# Altium PCB MainBoard.PCBDOC
Units mm, origin at the board's own origin, x right, y up, seen from the top; angles counter-clockwise.
Board outline 70.02 x 98.52 mm, 2 copper layers (Top Layer, Bottom Layer); 72 components, 92 nets, 308 pads, 55 vias.
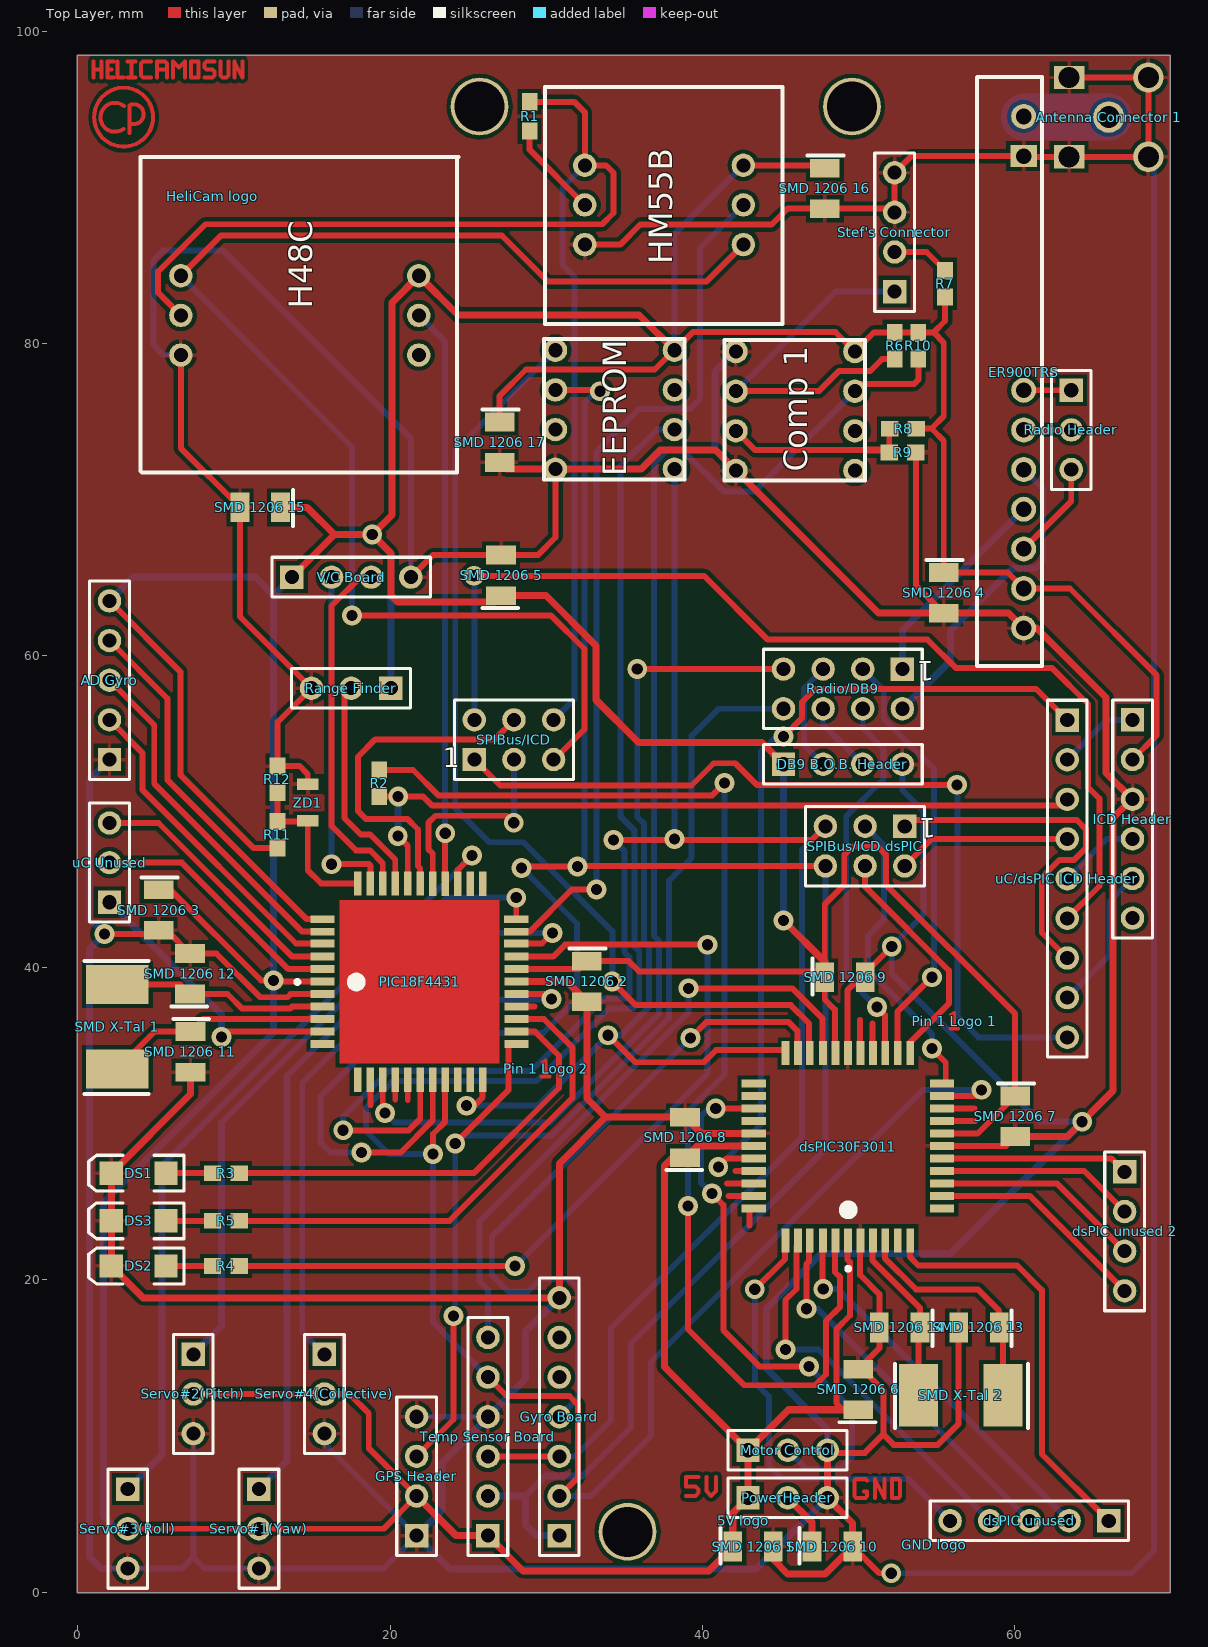
[diagram p0: Top Layer view]
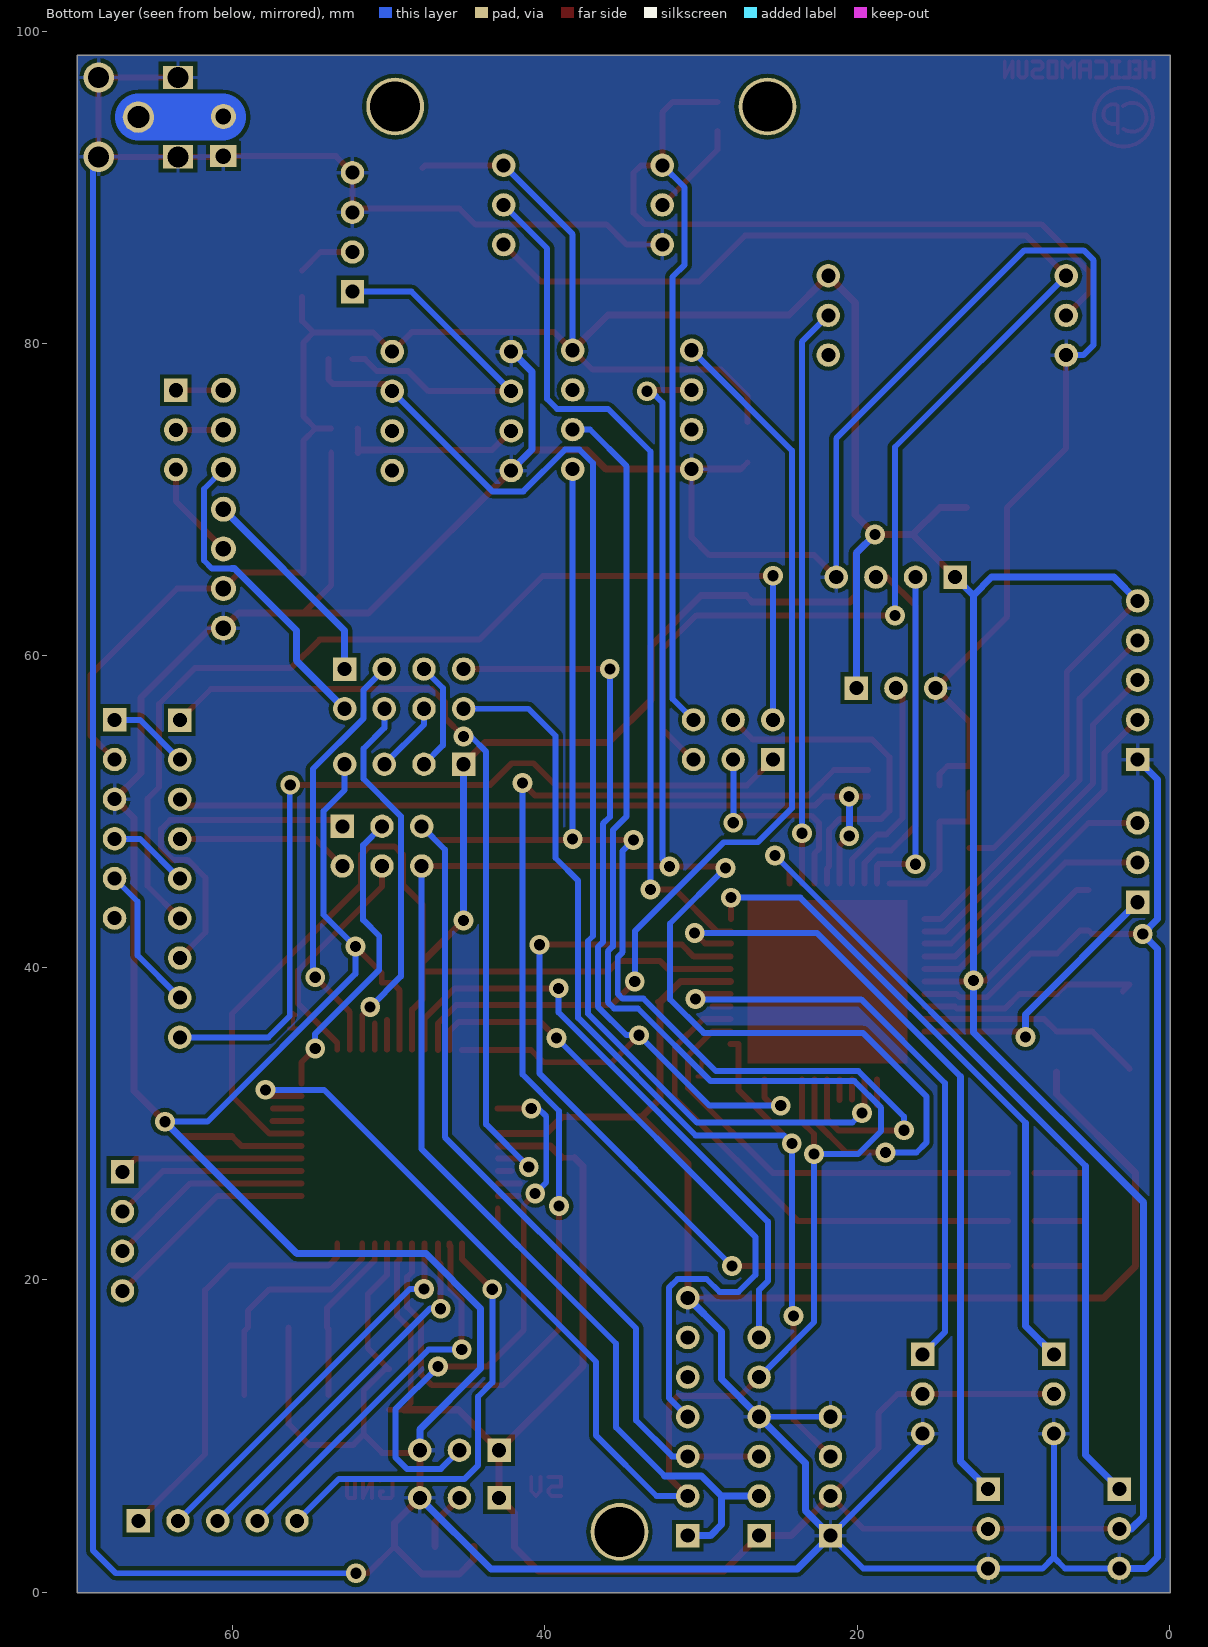
[diagram p1: Bottom Layer view, seen from below]

## Layer stack, top to bottom
Top Layer: signal copper 0.0356
Dielectric: core 0.32, FR-4, Dk 4.8
Bottom Layer: signal copper 0.0356

## Board outline
-0.05,-0.05 69.97,-0.05 69.97,98.47 -0.05,98.47

## Design rules (kind name [scope] priority, off if disabled: settings)
Clearance Clearance_1 [All] p1: gap=0.254
ComponentClearance [All] p1: gap=0.254 collisioncheckmode=0
HoleSize [All] p1: absolutevalues=TRUE maxlimit=5 minlimit=0.203 maxpercent=80.000 minpercent=20.000
PolygonConnect [All] p1: connectstyle=Relief reliefconductorwidth=0.254 reliefentries=4 polygonreliefangle="90 Angle"
RoutingVias [All] p1: holewidth=0.711 width=1.27 viastyle="Through Hole" minholewidth=0.711 minwidth=1.27 maxholewidth=0.711 maxwidth=1.27
SolderMaskExpansion [All] p1: expansion=0.102
TestPointUsage [All] p1: valid=0 allowmultiple=FALSE
Testpoint [All] p1: side=15 testpointundercomponent=TRUE minsize=1.016 maxsize=2.54 preferedsize=1.524 minholesize=0 maxholesize=1.016 preferedholesize=0.813 testpointgrid=0.025 style=1023 order=0-112345678
Width [All] p1: maxlimit=4 minlimit=0.203 preferedwidth=0.381
16 further rules are at their usual default settings.

## Components (designator, comment, footprint, x,y, rotation, side; value= is the part's Value field where it differs from the comment)
"5V logo" "logo" "5V logo" 42.672,4.572 r0 top
"AD Gyro" "Header 5" HDR1X5 2.032,53.34 r90 top
"Antenna Connector 1" "Antenna Connector" "Antenna Connector" 68.58,97.028 r270 top
"Carl logo" "logo" "Carl Logo" -4.064,101.6 r0 top
"Comp 1" "Comparator" "8-Pin DIP" 40.64,72.502 r0 top
"DB9 B.O.B. Header" "DB9 Break Out Board Header" HDR1X4 45.204,53.038 r0 top
DS1 "LED2" DSO-F2/D6.1 3.902,26.84 r180 top
DS2 "LED2" DSO-F2/D6.1 3.902,20.898 r180 top
DS3 "LED2" DSO-F2/D6.1 3.902,23.792 r180 top
dsPIC30F3011 "dsPIC30F3011" QFP7x7-G32/N#1 49.35,28.563 r180 top
"dsPIC unused" "Header 5" HDR1X5 66.04,4.572 r180 top
"dsPIC unused 2" "Header 4" HDR1X4 67.056,26.924 r270 top
EEPROM "25LC256 EEPROM" EEPROM 30.456,80.1 r0 top
ER900TRS "Easy Radio 900MHz" ER900TRS 60.592,91.994 r270 top
"GND logo" "logo" "GND logo" 54.864,3.048 r0 top
"GPS Header" "GPS Header" HDR1X4 21.702,3.62 r90 top
"Gyro Board" "Header for Gyro Board" HDR1X7 30.846,3.62 r90 top
H48C "Hitachi H48C 3Axis Accelerometer" H48C 6.604,84.328 r0 top
"HeliCam logo" "logo" HeliCamosun 8.636,89.408 r0 top
HM55B "HM55B Compass Module" HM55B 37.578,88.866 r0 top
"ICD Header" "Header 6" HDR1X6 67.564,55.88 r270 top
"Motor Control" "Connector for Motor Control" HDR1X3 42.932,9.094 r0 top
PIC18F4431 "PIC18F4431" QFP7x7-G32/N#2 21.912,39.094 r90 top
"Pin 1 Logo 1" "logo" "Pin 1 Logo" 56.15,36.576 r0 top
"Pin 1 Logo 2" "logo" "Pin 1 Logo" 29.972,33.528 r0 top
PowerHeader "Header 3" HDR1X3 42.932,6.046 r0 top
R1 "1K" CR1608-0603#1 28.942,94.454 r90 top
R2 "Res3" CR1608-0603#2 19.304,51.816 r90 top
R3 "Res3" CR1608-0603#2 9.49,26.84 r0 top
R4 "Res3" CR1608-0603#2 9.49,20.898 r0 top
R5 "Res3" CR1608-0603#2 9.49,23.792 r0 top
R6 "Res3" CR1608-0603#2 52.324,79.85 r90 top
R7 "Res3" CR1608-0603#2 55.55,83.82 r270 top
R8 "Res3" CR1608-0603#2 52.862,74.54 r0 top
R9 "Res3" CR1608-0603#2 52.832,73.01 r180 top
R10 "Res3" CR1608-0603#2 53.848,79.85 r90 top
R11 "Res3" CR1608-0603#2 12.792,48.516 r270 top
R12 "Res3" CR1608-0603#2 12.792,52.072 r270 top
"Radio Header" "Extra Radio Pins" HDR1X3 63.64,76.994 r270 top
Radio/DB9 "Header 4X2A" HDR2X4_CEN 52.824,59.134 r180 top
"Range Finder" "Header 3" HDR1X3 20.05,57.912 r180 top
Servo#1(Yaw) "Connector for Servo Motor" HDR1X3 11.6,6.604 r270 top
Servo#2(Pitch) "Connector for Servo Motor" HDR1X3 7.4,15.24 r270 top
Servo#3(Roll) "Connector for Servo Motor" HDR1X3 3.2,6.604 r270 top
Servo#4(Collective) "Connector for Servo Motor" HDR1X3 15.8,15.24 r270 top
"SMD 1206 1" "SMD 1206" "SMD 1206" 42.756,2.828 r0 top
"SMD 1206 2" "SMD 1206" "SMD 1206" 32.512,39.624 r270 top
"SMD 1206 3" "SMD 1206" "SMD 1206" 5.08,44.196 r270 top
"SMD 1206 4" "SMD 1206" "SMD 1206" 55.372,64.516 r270 top
"SMD 1206 5" "SMD 1206" "SMD 1206" 27.212,64.636 r90 top
"SMD 1206 6" "SMD 1206" "SMD 1206" 50.096,12.488 r90 top
"SMD 1206 7" "SMD 1206" "SMD 1206" 59.944,30.988 r270 top
"SMD 1206 8" "SMD 1206" "SMD 1206" 38.998,28.632 r90 top
"SMD 1206 9" "SMD 1206" "SMD 1206" 48.65,39.3 r0 top
"SMD 1206 10" "SMD 1206" "SMD 1206" 47.836,2.828 r0 top
"SMD 1206 11" "SMD 1206" "SMD 1206" 7.12,35.114 r270 top
"SMD 1206 12" "SMD 1206" "SMD 1206" 7.29,39.116 r90 top
"SMD 1206 13" "SMD 1206" "SMD 1206" 58.224,17.06 r180 top
"SMD 1206 14" "SMD 1206" "SMD 1206" 53.144,17.06 r180 top
"SMD 1206 15" "SMD 1206" "SMD 1206" 12.192,69.596 r180 top
"SMD 1206 16" "SMD 1206" "SMD 1206" 47.752,90.424 r270 top
"SMD 1206 17" "SMD 1206" "SMD 1206" 26.924,74.168 r270 top
"SMD X-Tal 1" "SMD X-Tal" "SMD X-Tal" 2.54,33.528 r90 top
"SMD X-Tal 2" "SMD X-Tal" "SMD X-Tal" 59.256,12.618 r180 top
SPIBus/ICD "Header 3X2A" HDR2X3_CEN 25.4,53.34 r0 top
"SPIBus/ICD dsPIC" "Header 3X2A" HDR2X3_CEN 52.972,49.06 r180 top
"Stef's Connector" "Header 4" HDR1X4 52.324,83.312 r90 top
"Temp Sensor Board" "SPI Temp Sensor Header" HDR1X6 26.274,3.62 r90 top
"uC Unused" "Header 3" HDR1X3 2.032,44.196 r90 top
"uC/dsPIC ICD Header" "Header 9" HDR1X9 63.384,55.868 r270 top
"V/C Board" "Voltage/Current Board Header" HDR1X4 13.716,65.024 r0 top
ZD1 "CZRF52C3" "Zener Diode" 14.732,49.784 r90 top

## Footprints (in the part's own frame and the unit in brackets; to place one, negate y for a bottom-side part, rotate by r counter-clockwise, add the part's x,y. Pads: shape width x height; smd on the part's side, far side on the other; paste and mask are expansions set on the pad)
"5V logo" [mm]
  Top Layer lines w0.254: -3.7,1.6 -3.1,1.6 -2.9,1.8 -2.9,2 -3.1,2.2 -3.7,2.2 -3.7,2.6 -3.7,2.8 -2.9,2.8 ; -2.4,2.8 -2.4,1.9 -2.1,1.6 ; -1.8,2.8 -1.8,1.9 -2.1,1.6 ; -2.1,1.6 -2.1,1.6
"8-Pin DIP" [mm] "8-Pin DIP"
  round 1.5 hole 0.9: 1(1.52,6.971) 2(1.52,4.431) 3(1.52,1.891) 4(1.52,-0.649) 5(9.14,-0.649) 6(9.14,1.891) 7(9.14,4.431) 8(9.14,6.971)
  silkscreen extent 0.8,-1.3 9.8,7.7
"Antenna Connector" [mm] "Antenna Connector"
  round 1.95 hole 1.35: 1(0,0) 1(5.08,0)
  rect 1.5x1.95 hole 1.35: 1(0,-5.08) 1(5.08,-5.08)
  round 2 hole 1.4: 2(2.54,-2.54)
"Carl Logo" [mm] "My personal Logo"
  Top Layer circle w0.254: c7.002,-7.112 r1.888
  Top Layer lines w0.254: 6.985,-7.874 cw(c6.448,-7.122) 7.039,-6.411 ; 7.366,-8.128 7.366,-6.35 cw(c7.65,-6.918) 7.412,-7.507
CR1608-0603#1 [mm] "Chip Resistor; Body 1.6 x 0.8 mm (LxW typ)"
  rect 1.1x1 smd: 1(-0.85,0) 2(1.016,0)
CR1608-0603#2 [mm] "Chip Resistor; Body 1.6 x 0.8 mm (LxW typ)"
  rect 1.1x1 smd: 1(-0.85,0) 2(0.85,0)
DSO-F2/D6.1 [mm] "SMT LED; 2 Flat Leads"
  rect 1.5x1.5 smd: 1(-1.75,0) 2(1.75,0)
  silkscreen extent -2.9,-1.15 3.2,1.15
EEPROM [mm] "8-pin EEPROM"
  round 1.5 hole 0.9: 1(0.142,-0.544) 2(0.142,-3.084) 3(0.142,-5.624) 4(0.142,-8.164) 5(7.762,-8.164) 6(7.762,-5.624) 7(7.762,-3.084) 8(7.762,-0.544)
  silkscreen extent -0.58,-8.82 8.42,0.19
ER900TRS [mm] "Easy Radio 900MHz"
  round 1.6 hole 1: 1(-2.54,0) 3(15,0) 4(17.54,0) 5(20.08,0) 6(22.62,0) 7(25.16,0) 8(27.7,0) 9(30.24,0)
  rect 1.4x1.7 hole 1: 2(0,0)
  silkscreen extent -5.07,-3 32.67,1.16
"GND logo" [mm]
  Top Layer lines w0.254: -4.5,3.4 -4.3,3.4 -4.3,3.1 -4.4,3 -5,3 -5.1,3.1 -5.1,4.1 -5,4.2 -4.4,4.2 -4.3,4.1 ; -3.8,3 -3.8,4.2 -3.2,3 -3.2,4.2 ; -2.7,3 -2.7,4.2 -2.3,4.2 -2.2,4.1 -2.2,3.1 -2.3,3 -2.7,3
H48C [mm] "Hitachi H48C 3Axis Accelerometer"
  round 1.5 hole 0.9: 1(0,0) 2(0,-2.54) 3(0,-5.08) 4(15.24,-5.08) 5(15.24,-2.54) 6(15.24,0)
  silkscreen extent -2.6,-12.6 17.8,7.6
HDR1X3 [mm] "Connector; Header; 3 Position"
  rect 1.5x1.5 hole 0.9: 1(0,0)
  round 1.5 hole 0.9: 2(2.54,0) 3(5.08,0)
  silkscreen extent -1.27,-1.27 6.35,1.27
HDR1X4 [mm] "Connector; Header; 4 Position"
  rect 1.5x1.5 hole 0.9: 1(0,0)
  round 1.5 hole 0.9: 2(2.54,0) 3(5.08,0) 4(7.62,0)
  silkscreen extent -1.27,-1.27 8.89,1.27
HDR1X5 [mm] "Connector; Header; 5 Position"
  rect 1.5x1.5 hole 0.9: 1(0,0)
  round 1.5 hole 0.9: 2(2.54,0) 3(5.08,0) 4(7.62,0) 5(10.16,0)
  silkscreen extent -1.27,-1.27 11.43,1.27
HDR1X6 [mm] "Connector; Header; 6 Position"
  rect 1.5x1.5 hole 0.9: 1(0,0)
  round 1.5 hole 0.9: 2(2.54,0) 3(5.08,0) 4(7.62,0) 5(10.16,0) 6(12.7,0)
  silkscreen extent -1.27,-1.27 13.97,1.27
HDR1X7 [mm] "Connector; Header; 7 Position"
  rect 1.5x1.5 hole 0.9: 1(0,0)
  round 1.5 hole 0.9: 2(2.54,0) 3(5.08,0) 4(7.62,0) 5(10.16,0) 6(12.7,0) 7(15.24,0)
  silkscreen extent -1.27,-1.27 16.51,1.27
HDR1X9 [mm] "Connector; Header; 9 Position"
  rect 1.5x1.5 hole 0.9: 1(0,0)
  round 1.5 hole 0.9: 2(2.54,0) 3(5.08,0) 4(7.62,0) 5(10.16,0) 6(12.7,0) 7(15.24,0) 8(17.78,0) 9(20.32,0)
  silkscreen extent -1.27,-1.27 21.59,1.27
HDR2X3_CEN [mm] "Connector; Header; 3x2 Position"
  rect 1.5x1.5 hole 0.9: 1(0,0)
  round 1.5 hole 0.9: 2(2.54,0) 3(5.08,0) 4(0,2.54) 5(2.54,2.54) 6(5.08,2.54)
  silkscreen extent -1.27,-1.27 6.35,3.81
HDR2X4_CEN [mm] "Connector; Header; 4x2 Position"
  rect 1.5x1.5 hole 0.9: 1(0,0)
  round 1.5 hole 0.9: 2(2.54,0) 3(5.08,0) 4(7.62,0) 5(0,2.54) 6(2.54,2.54) 7(5.08,2.54) 8(7.62,2.54)
  silkscreen extent -1.27,-1.27 8.89,3.81
HeliCamosun [mm] "HeliCamosun Logo"
  Top Layer lines w0.254: -7.62,7.62 -7.62,8.636 ; -7.62,8.128 -7.239,8.128 ; -7.112,7.62 -7.112,8.636 ; -6.731,8.128 -6.477,8.128 ; -6.35,7.62 -6.731,7.62 -6.731,8.636 -6.35,8.636 ; -6.096,8.636 -6.096,7.62 -5.715,7.62 ; -5.461,7.62 -4.953,7.62 ; -5.461,8.636 -4.953,8.636 ; -5.207,7.62 -5.207,8.636 ; -3.937,7.62 -4.445,7.62 -4.572,7.747 -4.572,8.509 -4.445,8.636 -3.937,8.636 ; -3.556,7.62 -3.556,8.636 -3.048,8.636 -2.921,8.509 -2.921,7.62 ; -3.556,8.128 -2.921,8.128 ; -2.54,7.62 -2.54,8.636 -2.159,8.255 -1.778,8.636 -1.778,7.62 ; -0.508,7.62 0,7.62 0.127,7.747 0.127,8.001 0,8.128 -0.381,8.128 -0.508,8.255 -0.508,8.509 -0.381,8.636 0.127,8.636 ; 0.508,8.636 0.508,7.747 0.635,7.62 0.889,7.62 1.016,7.747 1.016,8.636 ; 1.397,7.62 1.397,8.636 1.905,7.62 1.905,8.636 ; -1.397,7.62 -1.397,8.636 -0.889,8.636 -0.889,7.62 -1.397,7.62
HM55B [mm] "HM55B Compass Module"
  round 1.5 hole 0.9: 1(-5.1,2.54) 2(-5.1,0) 3(-5.1,-2.54) 4(5.06,-2.54) 5(5.06,0) 6(5.06,2.54)
  silkscreen extent -7.64,-7.64 7.56,7.56
"Pin 1 Logo" [mm] "Pin 1 Logo"
  Top Layer lines w0.254: -0.261,-0.48 0.247,-0.48 ; -0.2,0.4 -0.007,0.536 -0.007,-0.48
QFP7x7-G32/N#1 [mm] "32-Pin Plastic Thin Quad Flat Pack (TFQP)"
  rect 0.5x1.55 smd: 1(-3.98,-5.974) 2(-3.18,-5.974) 3(-2.38,-5.974) 4(-1.58,-5.974) 5(-0.78,-5.974) 6(0.02,-5.974) 7(0.82,-5.974) 8(1.62,-5.974) 9(2.465,-5.974) 10(3.22,-5.974) 11(4.02,-5.974) 23(4.02,6.029) 24(3.22,6.029) 25(2.465,6.029) 26(1.62,6.029) 27(0.82,6.029) 28(0.02,6.029) 29(-0.78,6.029) 30(-1.58,6.029) 31(-2.38,6.029) 32(-3.18,6.029) 33(-3.98,6.029)
  rect 1.55x0.5 smd: 12(6.051,-4.025) 13(6.051,-3.225) 14(6.051,-2.425) 15(6.051,-1.625) 16(6.051,-0.825) 17(6.051,-0.025) 18(6.051,0.775) 19(6.051,1.575) 20(6.051,2.375) 21(6.051,3.175) 22(6.051,3.975) 34(-6.011,3.975) 35(-6.011,3.175) 36(-6.011,2.375) 37(-6.011,1.575) 38(-6.011,0.775) 39(-6.011,-0.025) 40(-6.011,-0.825) 41(-6.011,-1.625) 42(-6.011,-2.425) 43(-6.011,-3.225) 44(-6.011,-4.025)
  silkscreen extent -0.31,3.77 0.29,7.97
QFP7x7-G32/N#2 [mm] "32-Pin Plastic Thin Quad Flat Pack (TFQP)"
  rect 0.5x1.55 smd: 1(-3.98,-6.185) 2(-3.18,-6.185) 3(-2.38,-6.185) 4(-1.58,-6.185) 5(-0.78,-6.185) 6(0.02,-6.185) 7(0.82,-6.185) 8(1.62,-6.185) 9(2.465,-6.174) 10(3.22,-6.174) 11(4.02,-6.174) 23(4.02,6.229) 24(3.22,6.229) 25(2.465,6.229) 26(1.62,6.229) 27(0.82,6.229) 28(0.02,6.229) 29(-0.78,6.229) 30(-1.58,6.229) 31(-2.38,6.229) 32(-3.18,6.229) 33(-3.98,6.229)
  rect 1.55x0.5 smd: 12(6.292,-4.025) 13(6.292,-3.225) 14(6.292,-2.425) 15(6.292,-1.625) 16(6.292,-0.825) 17(6.301,-0.025) 18(6.301,0.775) 19(6.301,1.575) 20(6.301,2.375) 21(6.301,3.175) 22(6.301,3.975) 34(-6.261,3.975) 35(-6.261,3.175) 36(-6.261,2.375) 37(-6.261,1.575) 38(-6.261,0.775) 39(-6.261,-0.025) 40(-6.261,-0.825) 41(-6.261,-1.625) 42(-6.261,-2.425) 43(-6.261,-3.225) 44(-6.261,-4.025)
  silkscreen extent -0.31,3.77 0.29,7.97
"SMD 1206" [mm] "SMD 1206"
  rect 1.2x1.9 smd: 1(-0.8,0.1) 2(1.8,0.1)
  silkscreen extent -1.6,-1 -1.6,1.3
"SMD X-Tal" [mm] "SMD X-Tal"
  rect 2.5x4 smd: 1(0,0) 2(5.4,0)
  silkscreen extent -1.6,-2 6.9,2.1
"Zener Diode" [mm] "CZRF52C3"
  rect 0.75x1.4 smd: 1(-0.375,0) 2(1.975,0)

## Part data
"AD Gyro" "dsPIC unused": "Header, 5-Pin"
"Comp 1": library part LP311P
"DB9 B.O.B. Header" "GPS Header" "V/C Board": library part "Header 4", "Header, 4-Pin"
DS1 DS2 DS3: "Typical RED, GREEN, YELLOW, AMBER GaAs LED"
"dsPIC unused 2" "Stef's Connector": "Header, 4-Pin"
EEPROM: library part EEPROM
ER900TRS: library part ER900TRS
"Gyro Board": library part "Header 7", "Header, 7-Pin"
H48C: library part H48C, "3 Axis Accelerometer"
"ICD Header": "Header, 6-Pin"
"Motor Control" "Radio Header" Servo#1(Yaw) Servo#2(Pitch) Servo#3(Roll) Servo#4(Collective): library part "Header 3", "Header, 3-Pin"
PowerHeader "Range Finder" "uC Unused": "Header, 3-Pin"
R1: library part Res3, "Resistor"
R2 R3 R4 R5 R6 R7 R8 R9 R10 R11 R12: "Resistor"
Radio/DB9: "Header, 4-Pin, Dual row"
"SMD 1206 1" "SMD 1206 2" "SMD 1206 3" "SMD 1206 4" "SMD 1206 5" "SMD 1206 6" "SMD 1206 7" "SMD 1206 8" "SMD 1206 9" "SMD 1206 10" "SMD 1206 11" "SMD 1206 12" "SMD 1206 13" "SMD 1206 14" "SMD 1206 15" "SMD 1206 16" "SMD 1206 17": "SMD 1206 Package Type"
SPIBus/ICD "SPIBus/ICD dsPIC": "Header, 3-Pin, Dual row"
"Temp Sensor Board": library part "Header 6", "Header, 6-Pin"
"uC/dsPIC ICD Header": "uC/dsPIC ICD Header"

## Free pads (board coordinates)
  round 3.7 hole 3.2: ""(25.74,95.17) ""(35.22,3.87) ""(49.59,95.17)

## Via types
v1: diameter 1.27, hole 0.711, Top Layer to Bottom Layer, 55 vias

## Nets (pads, with @x,y where several pads share a name; then routed paths per layer and width w, separated by ;. In a path a pad name is that pad's centre, name@x,y a point inside that pad or via, vN(x,y) a via of type N, cw(c..) or ccw(c..) an arc to the next point about the centre after c; other vN are vias at no path point)
3.3V: "SMD 1206 10.1" PowerHeader.2 | length 3.8
  Top Layer w0.45: PowerHeader.2 47.036,4.482 47.036,2.928
5V: "AD Gyro.5" "Comp 1.8" "DB9 B.O.B. Header.1" "GPS Header.2" "ICD Header.2" "Motor Control.1" "Range Finder.1" "SMD 1206 1.1" "SMD 1206 2.1" "SMD 1206 3.1" "SMD 1206 4.1" "SMD 1206 5.1" "SMD 1206 6.1" "SMD 1206 7.1" "SMD 1206 8.1" "SMD 1206 9.1" "SMD 1206 15.1" "SMD 1206 16.1" "SMD 1206 17.1" "Temp Sensor Board.1" "V/C Board.1" dsPIC30F3011.7 dsPIC30F3011.17 dsPIC30F3011.28 dsPIC30F3011.40 EEPROM.8 ER900TRS.8 H48C.6 HM55B.6 PIC18F4431.7 PIC18F4431.28 PowerHeader.1 R6.2 R7.2 R8.2 R10.2 R11.2 Servo#1(Yaw).2 Servo#2(Pitch).2 Servo#3(Roll).2 Servo#4(Collective).2 | length 487.2
  Top Layer w0.381: 2.032,63.5 6.57,58.962 6.57,52.36 11.264,47.666 R11.2 ; 3.2,4.064 19.606,4.064 21.702,6.16 18.64,9.222 18.64,11.46 17.4,12.7 7.4,12.7 ; 5.18,44.996 5.934,44.996 11.738,39.192 v1(12.548,39.192) ; v1@12.64,39.114 PIC18F4431.28 ; 26.716,63.44 27.112,63.836 ; 27.024,74.968 27.024,76.634 28.71,78.32 36.96,78.32 EEPROM.8@38.196,79.556 ; PIC18F4431.7 32.102,39.914 32.612,40.424 35.293,40.424 35.946,39.771 47.85,39.771 ; 38.102,27.832 38.898,27.832 ; EEPROM.8 38.236,79.556 39.4,80.72 48.533,80.72 49.78,79.473 51.007,80.7 54.82,80.7 ; 41.956,2.906 41.956,2.928 ; HM55B.6 47.67,91.406 47.852,91.224 ; dsPIC30F3011.7@48.498,34.749 48.498,37.317 47.85,37.965 47.85,39.4 47.85,39.771 ; dsPIC30F3011.28@49.298,22.335 49.298,21.322 49.469,21.151 49.469,17.722 48.59,16.843 48.59,12.12 49.022,11.688 49.996,11.688 ; R8.2 54.69,74.54 ; 55.524,65.264 55.472,65.316 ; R7.2 55.55,81.43 54.82,80.7 ; dsPIC30F3011.40@55.579,29.389 57.645,29.389 60.044,31.788 60.046,31.788 60.046,37.045 51.765,45.325 51.765,47.244 51.232,47.777 49.632,47.777 49.098,47.244 49.098,45.314 47.85,44.065 47.85,40.39 47.85,39.771 ; 67.564,53.34 69.11,54.886 69.11,58.74 63.556,64.294 ER900TRS.8 59.57,65.316 55.472,65.316 ; 54.69,74.54 55.472,73.758 55.472,65.316 ; 54.69,74.54 55.472,75.322 55.472,80.048 54.82,80.7
  Top Layer w0.45: 12.992,69.496 14.696,69.496 16.442,67.75 ; 13.716,65.024 16.442,67.75 ; 21.702,6.16 24.242,3.62 26.274,3.62 28.524,1.37 40.42,1.37 41.956,2.906 ; 26.716,63.44 20.47,63.44 20.06,63.85 20.06,66.55 v1(18.86,67.75) ; 27.112,63.836 29.994,63.836 33.21,60.62 33.21,57.14 35.93,54.42 43.822,54.42 45.204,53.038 ; 38.102,27.832 37.57,27.3 37.57,14.456 38.011,14.015 42.932,9.094 ; EEPROM.8 35.961,81.813 24.359,81.813 H48C.6 20.117,82.601 20.117,69.007 v1(18.86,67.75) ; 38.898,27.832 39.655,28.589 dsPIC30F3011.17@43.017,28.589 ; 41.956,2.928 41.956,5.07 PowerHeader.1 42.932,9.094 ; v1(45.212,43.028) 47.85,40.39 ; 49.022,11.688 45.526,11.688 42.932,9.094 ; 16.442,67.75 v1(18.86,67.75)
  Bottom Layer w0.381: EEPROM.8 38.218,86.986 HM55B.6 ; v1@45.204,43.036 v1(45.212,43.028)
  Bottom Layer w0.45: 2.032,63.5 3.556,65.024 11.379,65.024 12.548,63.856 ; 3.2,4.064 2.436,4.064 1.64,4.86 1.64,24.957 12.548,35.865 12.548,63.856 ; 13.716,65.024 12.548,63.856 ; v1(18.86,67.75) 20.05,66.56 20.05,57.912 ; v1@45.204,43.036 45.204,53.038
"ANTICOLLISION LED": PIC18F4431.3 R5.2 | length 32.2
  Top Layer w0.381: R5.2 23.812,23.792 31.68,31.66 31.68,34.9 29.866,36.714 PIC18F4431.3
BSY: "Radio Header.2" ER900TRS.4 | length 3
  Top Layer w0.381: ER900TRS.4 63.64,74.454
"DSPIC #MCLR": "uC/dsPIC ICD Header.1" dsPIC30F3011.18 | length 52.7
  Top Layer w0.381: v1(41.03,27.24) 41.579,27.789 dsPIC30F3011.18@43.017,27.789 ; v1(45.212,54.813) 46.406,56.007 46.406,57.023 47.244,57.861 61.391,57.861 63.384,55.868
  Bottom Layer w0.381: v1(41.03,27.24) 43.764,29.974 43.764,53.848 44.729,54.813 v1(45.212,54.813)
"DSPIC ICD SDI": "SPIBus/ICD dsPIC.1" "uC/dsPIC ICD Header.7" | length 22.7
  Top Layer w0.381: 52.972,49.06 53.366,49.454 64.008,49.454 64.579,48.883 64.579,47.662 63.83,46.914 62.884,46.914 61.75,45.78 61.75,42.262 63.384,40.628
"DSPIC ICD SDO": "SPIBus/ICD dsPIC.4" "uC/dsPIC ICD Header.4" | length 11.1
  Top Layer w0.381: 52.972,46.52 54.7,48.248 63.384,48.248
"DSPIC RX": dsPIC30F3011.3 Radio/DB9.6 | length 24.4
  Top Layer w0.381: v1(51.19,37.481) 51.698,36.973 dsPIC30F3011.3@51.698,34.749
  Bottom Layer w0.381: Radio/DB9.6 50.284,55.374 51.613,54.045 51.613,52.095 49.225,49.708 49.225,39.446 v1(51.19,37.481)
"DSPIC TX": dsPIC30F3011.2 Radio/DB9.2 | length 27.3
  Top Layer w0.381: dsPIC30F3011.2@52.498,34.749 52.498,37.178 v1(54.71,39.39)
  Bottom Layer w0.381: Radio/DB9.2 51.63,57.789 51.63,55.96 54.86,52.73 54.86,39.54 v1(54.71,39.39) ; v1@54.708,39.368 v1@54.716,39.387
ER_DIN: ER900TRS.6 Radio/DB9.1 | length 13.5
  Bottom Layer w0.45: Radio/DB9.1 52.824,61.606 ER900TRS.6
ER_DOUT: ER900TRS.5 Radio/DB9.5 | length 20.4
  Bottom Layer w0.381: 60.084,65.578 61.328,65.578 61.836,66.086 61.836,70.669 ER900TRS.5
  Bottom Layer w0.45: Radio/DB9.5 55.9,59.67 55.9,61.6 59.878,65.578 60.084,65.578
GND: "AD Gyro.1" "Antenna Connector 1.1" "Comp 1.1" "Comp 1.4" "DB9 B.O.B. Header.4" "GPS Header.1" "GPS Header.4" "Gyro Board.7" "ICD Header.3" "Motor Control.3" "Range Finder.3" "SMD 1206 1.2" "SMD 1206 2.2" "SMD 1206 3.2" "SMD 1206 4.2" "SMD 1206 5.2" "SMD 1206 6.2" "SMD 1206 7.2" "SMD 1206 8.2" "SMD 1206 9.2" "SMD 1206 10.2" "SMD 1206 11.2" "SMD 1206 12.2" "SMD 1206 13.2" "SMD 1206 14.2" "SMD 1206 15.2" "SMD 1206 16.2" "SMD 1206 17.2" "Stef's Connector.3" "Stef's Connector.4" "Temp Sensor Board.4" "V/C Board.4" DS1.2 DS2.2 DS3.2 dsPIC30F3011.6 dsPIC30F3011.16 dsPIC30F3011.29 dsPIC30F3011.39 EEPROM.4 ER900TRS.2 ER900TRS.9 H48C.3 HM55B.3 PIC18F4431.6 PIC18F4431.29 PowerHeader.3 R9.1 R12.1 Servo#1(Yaw).3 Servo#2(Pitch).3 Servo#3(Roll).3 Servo#4(Collective).3 ZD1.2 | length 710.1
  Top Layer w0.381: v1(1.702,42.164) 4.948,42.164 5.18,42.396 5.71,42.396 7.19,40.916 8.875,40.916 11.679,38.112 13.434,38.112 13.636,38.314 PIC18F4431.29 ; H48C.3 6.604,73.284 10.392,69.496 10.392,62.49 14.97,57.912 12.792,55.734 R12.1 14.208,52.922 14.732,52.398 ZD1.2@14.732,51.683 ; 21.336,65.024 22.748,66.436 27.112,66.436 29.464,66.436 30.598,67.57 EEPROM.4 ; 27.024,72.368 27.456,71.936 ; HM55B.3 34.756,86.326 36.04,87.61 44.45,87.61 45.464,88.624 52.092,88.624 52.324,88.392 52.324,90.932 53.386,91.994 ER900TRS.2 ; 32.612,37.824 32.766,37.824 ; 37.946,30.432 38.913,30.432 ; 42.147,71.853 42.16,71.853 ; 48.012,8.93 50.42,8.93 51.6,10.11 ; dsPIC30F3011.6@49.298,34.749 49.298,38.554 49.784,39.04 50.45,39.04 50.45,39.67 v1(52.14,41.36) ; 49.636,2.928 51.348,1.215 v1(52.108,1.215) ; dsPIC30F3011.29@50.098,22.335 50.098,22.294 50.104,22.288 50.104,20.33 51.344,19.09 51.344,16.96 51.344,15.636 49.996,14.288 50.242,14.288 51.6,12.93 51.6,10.11 ; R9.1 53.682,64.506 55.472,62.716 55.48,62.724 ; dsPIC30F3011.39@55.579,28.589 59.445,28.589 60.044,29.188 ; 56.424,16.96 56.424,10.784 55.084,9.444 52.266,9.444 51.6,10.11 ; ER900TRS.2@60.638,91.948 68.58,91.948 68.58,97.028 63.5,97.028 ; 63.454,91.994 63.5,91.948 ; 67.52,50.8 67.564,50.8
  Top Layer w0.45: 7.22,33.314 7.22,31.908 DS1.2 DS3.2 DS2.2 4.19,18.86 30.846,18.86 30.846,27.471 33.807,30.432 ; 27.456,71.936 36.076,71.936 37.31,73.17 40.843,73.17 51.297,62.716 55.472,62.716 59.63,62.716 ER900TRS.9 61.422,61.754 65.87,57.306 65.87,52.48 67.55,50.8 ; PIC18F4431.6 31.322,39.114 32.612,37.824 32.612,31.627 33.807,30.432 ; 37.946,30.432 33.807,30.432 ; 38.898,30.432 39.941,29.389 dsPIC30F3011.16@43.026,29.389 ; 44.556,2.928 44.556,2.084 45.47,1.17 47.878,1.17 49.636,2.928 49.636,4.422 PowerHeader.3 48.012,9.094 ; 60.044,29.188 63.388,29.188 66.32,32.12 66.32,49.6 67.52,50.8
  Bottom Layer w0.381: 3.2,1.524 6.684,1.524 7.4,2.24 ; H48C.3 5.512,79.248 4.85,79.91 4.85,85.32 5.49,85.96 9.285,85.96 21.336,73.909 21.336,65.024 ; 7.4,10.16 7.4,2.24 ; 15.8,10.16 15.8,9.522 21.5,3.822 ; 21.702,3.618 21.702,3.62 19.606,1.524 8.116,1.524 7.4,2.24 ; 21.702,11.24 26.274,11.24 ; v1(52.108,1.215) 67.495,1.215 68.94,2.66 68.94,91.588 68.58,91.948 ; 52.824,53.038 52.824,51.392 54.178,50.038 54.178,43.398 v1(52.14,41.36) 52.14,39.614 61.614,30.14 v1(64.34,30.14)
  Bottom Layer w0.45: 2.032,53.34 0.75,52.058 0.75,43.116 v1(1.702,42.164) 0.75,41.212 0.75,2.26 1.486,1.524 3.2,1.524 ; 21.702,3.618 23.83,1.49 43.456,1.49 PowerHeader.3 ; 21.702,3.62 23.317,5.235 23.317,8.283 26.274,11.24 28.69,13.656 28.69,16.704 30.846,18.86 ; 42.16,71.853 40.82,73.193 40.82,78.18 42.113,79.473 42.16,79.473 ; 48.012,9.094 48.012,10.428 44.12,14.32 44.12,18.187 47.625,21.692 55.892,21.692 v1(64.34,30.14)
"GYRO ST1": "Gyro Board.5"
"GYRO ST2": "Gyro Board.6"
MOTOR: "Motor Control.2" dsPIC30F3011.14 | length 35.9
  Top Layer w0.381: v1(40.62,25.54) 41.351,24.809 41.351,16.789 43.688,14.453 v1(46.838,14.453) ; v1(40.869,30.989) dsPIC30F3011.14@43.026,30.989
  Bottom Layer w0.381: v1(40.62,25.54) 39.91,26.25 39.91,30.48 40.419,30.989 v1(40.869,30.989) ; 45.472,9.094 46.667,7.899 48.844,7.899 49.581,8.636 49.581,11.709 v1(46.838,14.453)
"NetAD Gyro_2": "AD Gyro.2" PIC18F4431.25 | length 21
  Top Layer w0.381: 2.032,55.88 4.16,53.752 4.16,51.38 13.981,41.559 PIC18F4431.25
"NetAD Gyro_3": "AD Gyro.3" PIC18F4431.24 | length 22.5
  Top Layer w0.381: 2.032,58.42 4.9,55.552 4.9,51.79 14.376,42.314 PIC18F4431.24
"NetAD Gyro_4": "AD Gyro.4" PIC18F4431.23 | length 24.1
  Top Layer w0.381: 2.032,60.96 5.74,57.252 5.74,52.04 14.666,43.114 PIC18F4431.23
"NetComp 1_2": "Comp 1.2" "Stef's Connector.1" R6.1 | length 23.8
  Top Layer w0.381: 42.16,76.933 47.463,76.933 48.75,78.22 50.75,78.22 51.53,79 R6.1
  Bottom Layer w0.381: 42.16,76.933 48.539,83.312 52.324,83.312
"NetComp 1_3": "Comp 1.3" R8.1 R9.2 | length 11.9
  Top Layer w0.381: 42.16,74.393 43.393,73.16 50.44,73.16 ; R9.2 51.982,74.51 R8.1
  Top Layer w0.45: 50.44,73.16 51.832,73.16 R9.2
"NetDB9 B.O.B. Header_2": "DB9 B.O.B. Header.2" Radio/DB9.3 | length 7.1
  Bottom Layer w0.381: 47.744,53.038 46.533,54.249 46.533,57.923 Radio/DB9.3
"NetDB9 B.O.B. Header_3": "DB9 B.O.B. Header.3" Radio/DB9.7 | length 4.6
  Bottom Layer w0.381: Radio/DB9.7 47.744,55.578 50.284,53.038
NetDS1_1: DS1.1 R3.1 | length 3
  Top Layer w0.381: DS1.1 R3.1
NetDS2_1: DS2.1 R4.1 | length 3
  Top Layer w0.381: DS2.1 R4.1
NetDS3_1: DS3.1 R5.1 | length 3
  Top Layer w0.381: DS3.1 R5.1
NetdsPIC30F3011_1: "SPIBus/ICD dsPIC.5" dsPIC30F3011.1 | length 15
  Top Layer w0.381: 50.432,46.52 50.432,45.194 50.436,45.194 55.8,39.83 55.8,37.7 53.298,35.198 dsPIC30F3011.1@53.298,34.749
NetdsPIC30F3011_23: "dsPIC unused.5" dsPIC30F3011.23 | length 28.5
  Top Layer w0.381: v1(43.368,19.405) 45.298,21.336 dsPIC30F3011.23@45.298,22.335
  Bottom Layer w0.381: v1(43.368,19.405) 43.368,13.44 44.272,12.536 44.272,8.128 45.136,7.264 53.188,7.264 55.88,4.572
NetdsPIC30F3011_24: "dsPIC unused.4" dsPIC30F3011.24 | length 24.8
  Top Layer w0.381: v1(45.326,15.544) 45.326,18.717 46.038,19.428 46.038,22.167 46.098,22.167 dsPIC30F3011.24@46.098,22.335
  Bottom Layer w0.381: v1(45.326,15.544) 47.448,15.544 58.42,4.572
NetdsPIC30F3011_25: "dsPIC unused.3" dsPIC30F3011.25 | length 24.2
  Top Layer w0.381: v1(46.672,18.162) 46.672,21.024 46.853,21.205 dsPIC30F3011.25@46.853,22.335
  Bottom Layer w0.381: v1(46.672,18.162) 47.371,18.162 60.96,4.572
NetdsPIC30F3011_26: "dsPIC unused.2" dsPIC30F3011.26 | length 24.8
  Top Layer w0.381: dsPIC30F3011.26@47.698,22.335 47.698,19.485 v1(47.752,19.431)
  Bottom Layer w0.381: v1(47.752,19.431) 48.641,19.431 63.5,4.572
NetdsPIC30F3011_27: dsPIC30F3011.27 R2.2 | length 78.6
  Top Layer w0.381: R2.2 21.474,52.666 23.096,51.044 40.641,51.044 v1(41.427,51.83) ; v1(39.091,24.74) 39.091,16.851 42.683,13.259 47.244,13.259 47.93,13.945 47.93,17.38 48.834,18.284 48.834,20.18 48.498,20.516 dsPIC30F3011.27@48.498,22.335
  Bottom Layer w0.381: v1(39.091,24.74) 39.091,30.823 41.427,33.16 v1(41.427,51.83)
NetdsPIC30F3011_30: "SMD 1206 14.1" "SMD X-Tal 2.2" dsPIC30F3011.30 | length 11
  Top Layer w0.381: dsPIC30F3011.30@50.898,22.335 50.898,21.262 53.944,18.216 53.944,16.96 53.856,16.872 53.856,12.618
NetdsPIC30F3011_31: "SMD 1206 13.1" "SMD X-Tal 2.1" dsPIC30F3011.31 | length 15.2
  Top Layer w0.381: dsPIC30F3011.31@51.698,22.335 51.698,21.392 53.69,19.4 57.65,19.4 59.024,18.026 59.024,16.96 59.256,16.728 59.256,12.618
NetdsPIC30F3011_33: "dsPIC unused.1" dsPIC30F3011.33 | length 26.8
  Top Layer w0.381: dsPIC30F3011.33@53.298,22.335 53.298,21.48 53.848,20.93 60.18,20.93 61.76,19.35 61.76,8.852 66.04,4.572
NetdsPIC30F3011_35: "dsPIC unused 2.4" dsPIC30F3011.35 | length 14
  Top Layer w0.381: dsPIC30F3011.35@55.579,25.389 60.971,25.389 67.056,19.304
NetdsPIC30F3011_36: "dsPIC unused 2.3" dsPIC30F3011.36 | length 13.3
  Top Layer w0.381: dsPIC30F3011.36@55.579,26.189 62.711,26.189 67.056,21.844
NetdsPIC30F3011_37: "dsPIC unused 2.2" dsPIC30F3011.37 | length 12.6
  Top Layer w0.381: dsPIC30F3011.37@55.579,26.989 64.451,26.989 67.056,24.384
NetdsPIC30F3011_38: "dsPIC unused 2.1" dsPIC30F3011.38 | length 11.8
  Top Layer w0.381: dsPIC30F3011.38@55.579,27.789 66.191,27.789 67.056,26.924
NetdsPIC30F3011_44: "SPIBus/ICD dsPIC.2" dsPIC30F3011.44 | length 19.5
  Top Layer w0.381: v1(54.712,34.823) 55.601,33.934 55.601,32.589 dsPIC30F3011.44@55.579,32.589
  Bottom Layer w0.381: 50.432,49.06 51.638,47.854 51.638,43.066 50.609,42.037 50.609,39.871 54.712,35.768 v1(54.712,34.823)
NetHM55B_2: HM55B.2 R1.1 | length 6.2
  Top Layer w0.381: R1.1 28.942,92.402 HM55B.2
"NetICD Header_1": "ICD Header.1" "uC/dsPIC ICD Header.2" | length 5.2
  Bottom Layer w0.381: 63.384,53.328 65.924,55.868 67.552,55.868 67.564,55.88
"NetICD Header_4": "ICD Header.4" "uC/dsPIC ICD Header.5" | length 5.2
  Bottom Layer w0.381: 63.384,45.708 65.924,48.248 67.552,48.248 67.564,48.26
"NetICD Header_5": "ICD Header.5" "uC/dsPIC ICD Header.8" | length 9.4
  Bottom Layer w0.381: 63.384,38.088 66.09,40.794 66.09,44.246 67.564,45.72
NetPIC18F4431_16: PIC18F4431.16 SPIBus/ICD.2 | length 13.9
  Top Layer w0.381: PIC18F4431.16 22.737,47.316 22.454,47.6 22.454,49.284 22.91,49.74 27.48,49.74 v1(27.93,49.29)
  Bottom Layer w0.381: v1(27.93,49.29) 27.93,53.33 SPIBus/ICD.2
NetPIC18F4431_17: PIC18F4431.17 SPIBus/ICD.5 | length 22.3
  Top Layer w0.381: PIC18F4431.17 21.937,46.364 21.793,46.507 21.793,48.857 21.11,49.54 18.45,49.54 17.936,50.054 17.936,53.506 19.06,54.63 26.7,54.63 27.94,55.87 SPIBus/ICD.5
NetPIC18F4431_19: "Range Finder.2" PIC18F4431.19 | length 14.4
  Top Layer w0.381: 17.51,57.912 17.08,57.482 17.08,49.59 18.13,48.54 18.73,48.54 20.337,46.933 PIC18F4431.19
NetPIC18F4431_20: "V/C Board.3" PIC18F4431.20 | length 23
  Top Layer w0.381: 18.796,65.024 18.094,65.024 16.25,63.18 16.25,49.09 17.832,47.508 18.732,47.508 19.537,46.703 PIC18F4431.20
NetPIC18F4431_21: "V/C Board.2" PIC18F4431.21 | length 22.1
  Top Layer w0.381: v1(16.256,46.634) 18.644,46.634 18.737,46.541 PIC18F4431.21
  Bottom Layer w0.381: v1(16.256,46.634) 16.256,65.024
NetPIC18F4431_26: "uC Unused.3" PIC18F4431.26 | length 17.2
  Top Layer w0.381: 2.032,49.276 5.174,49.276 13.736,40.714 PIC18F4431.26
NetPIC18F4431_27: "uC Unused.2" PIC18F4431.27 | length 16.5
  Top Layer w0.381: 2.032,46.736 6.664,46.736 13.486,39.914 PIC18F4431.27
NetPIC18F4431_30: "SMD 1206 12.1" "SMD X-Tal 1.2" PIC18F4431.30 | length 14.5
  Top Layer w0.381: 2.982,38.486 2.54,38.928 6.578,38.928 7.19,38.316 9.594,38.316 10.53,37.38 13.6,37.38 13.734,37.514 PIC18F4431.30
NetPIC18F4431_31: "SMD 1206 11.1" "SMD X-Tal 1.1" PIC18F4431.31 | length 14.5
  Top Layer w0.381: 2.54,33.528 4.926,35.914 7.22,35.914 8.02,36.714 PIC18F4431.31
NetPIC18F4431_32: "uC Unused.1" PIC18F4431.32 | length 18.2
  Top Layer w0.381: v1(9.21,35.57) 9.554,35.914 PIC18F4431.32
  Bottom Layer w0.45: 2.032,44.196 9.21,37.018 v1(9.21,35.57)
NetR7_1: "Stef's Connector.2" R7.1 | length 3.7
  Top Layer w0.381: 52.324,85.852 54.368,85.852 R7.1
RDY: "Radio Header.3" ER900TRS.7 | length 6.3
  Top Layer w0.381: ER900TRS.7 63.64,69.882 63.64,71.914
"RPM SENSOR": "Comp 1.7" PIC18F4431.36 R10.1 | length 81
  Top Layer w0.381: PIC18F4431.36 19.537,30.843 v1(19.69,30.69) ; 49.78,76.933 50.237,77.39 53.56,77.39 53.848,77.678 R10.1
  Bottom Layer w0.381: v1(19.69,30.69) 20.294,30.086 30.268,30.086 37.236,37.054 37.236,41.714 36.919,42.031 36.919,72.326 37.795,73.203 38.697,73.203 41.38,70.52 43.367,70.52 43.749,70.902 49.78,76.933
RSSI: "Radio Header.1" ER900TRS.3 | length 3
  Top Layer w0.381: ER900TRS.3 63.64,76.994
SCK: "Gyro Board.2" "Temp Sensor Board.5" dsPIC30F3011.43 EEPROM.6 PIC18F4431.41 | length 142.7
  Top Layer w0.381: v1(22.758,28.067) 22.758,29.35 23.537,30.129 PIC18F4431.41 ; 26.274,13.78 27.481,12.573 31.496,12.573 32.055,12.014 32.055,7.369 30.846,6.16 ; dsPIC30F3011.43@55.579,31.789 57.494,31.789 v1(57.887,32.182)
  Bottom Layer w0.381: 26.274,13.78 22.758,17.296 v1(22.758,28.067) 19.933,28.067 18.46,29.54 18.46,31.032 20.169,32.741 29.381,32.741 34.03,37.39 35.56,37.39 35.966,37.797 35.966,41.054 35.649,41.371 35.649,48.819 34.76,49.708 34.76,72.123 37.113,74.476 EEPROM.6 ; 30.846,6.16 32.85,6.16 36.718,10.028 36.718,14.748 54.152,32.182 v1(57.887,32.182)
SDI: "Gyro Board.3" "SPIBus/ICD dsPIC.3" "Temp Sensor Board.3" EEPROM.5 PIC18F4431.39 | length 131.1
  Top Layer w0.381: v1(17,29.59) 21.2,29.59 21.937,30.327 PIC18F4431.39 ; 26.274,8.7 30.846,8.7 ; v1(34.315,48.184) 47.016,48.184 47.892,49.06
  Bottom Layer w0.381: v1(17,29.59) 17,30.47 19.906,33.376 29.036,33.376 33.685,38.025 35.024,38.025 35.331,38.333 35.331,40.68 35.014,40.998 35.014,47.485 v1@34.01,48.489 ; 30.846,8.7 31.85,8.7 34.16,11.01 34.16,16.9 46.406,29.146 46.406,47.574 47.892,49.06 ; v1(38.218,48.242) EEPROM.5
SDO: "Gyro Board.1" "SPIBus/ICD dsPIC.6" "Temp Sensor Board.2" EEPROM.2 PIC18F4431.40 | length 152.7
  Top Layer w0.381: v1(18.18,28.17) 20.68,28.17 22.737,30.227 PIC18F4431.40 ; v1(28.42,46.4) 28.51,46.49 v1(32.01,46.49) ; EEPROM.2 33.374,77.016 v1(33.46,76.93) ; v1@32.04,46.52 47.892,46.52
  Bottom Layer w0.381: v1@18.18,28.14 v1(18.18,28.17) 16.19,28.17 15.56,28.8 15.56,31.76 19.63,35.83 29.83,35.83 31.98,37.98 31.98,42.84 v1(28.42,46.4) ; v1(32.01,46.49) 32.46,46.94 32.46,76.199 33.191,76.93 v1(33.46,76.93) ; 32.322,7.442 35.44,10.56 35.44,15.93 47.892,28.382 47.892,46.52
  Bottom Layer w0.45: 26.274,6.16 28.68,6.16 29.962,7.442 32.322,7.442 ; 28.69,6.17 28.69,4.33 29.4,3.62 30.846,3.62
SERVO_COLLECTIVE: PIC18F4431.5 Servo#4(Collective).1 | length 38.5
  Top Layer w0.381: PIC18F4431.5 30.026,38.314 v1(30.35,37.99)
  Bottom Layer w0.381: 15.8,15.24 14.38,16.66 14.38,32.616 19.744,37.98 30.34,37.98 v1(30.35,37.99)
SERVO_PITCH: PIC18F4431.11 Servo#2(Pitch).1 | length 41.8
  Top Layer w0.381: PIC18F4431.11 v1(28.086,44.49)
  Bottom Layer w0.381: 9.21,30.07 23.63,44.49 v1(28.086,44.49)
  Bottom Layer w0.45: 7.4,15.24 9.21,17.05 9.21,30.07
SERVO_ROLL: PIC18F4431.14 Servo#3(Roll).1 | length 51.9
  Top Layer w0.381: PIC18F4431.14 24.337,46.267 v1(25.26,47.19)
  Bottom Layer w0.381: 5.38,27.31 v1(25.26,47.19)
  Bottom Layer w0.45: 3.2,6.604 5.38,8.784 5.38,27.31
SERVO_YAW: PIC18F4431.9 Servo#1(Yaw).1 | length 50.6
  Top Layer w0.381: PIC18F4431.9 29.741,41.559 v1(30.402,42.22)
  Bottom Layer w0.381: 13.39,33.05 22.56,42.22 v1(30.402,42.22)
  Bottom Layer w0.45: 11.6,6.604 13.39,8.394 13.39,33.05
SIGNAL: "Antenna Connector 1.2" ER900TRS.1 | length 5.4
  Bottom Layer w3: ER900TRS.1@60.638,94.488 66.04,94.488
"SS COMPASS": HM55B.5 PIC18F4431.10 | length 55.9
  Top Layer w0.381: PIC18F4431.10 28.954,42.314 31.65,45.01 v1(33.236,45.01)
  Bottom Layer w0.381: v1(33.236,45.01) 33.236,73.076 35.95,75.79 39.21,75.79 39.86,76.44 39.86,86.088 HM55B.5
"SS EEPROM": dsPIC30F3011.9 EEPROM.1 | length 64
  Top Layer w0.381: v1(34.239,39.116) 35.75,37.605 45.682,37.605 46.853,36.433 dsPIC30F3011.9@46.853,34.738
  Bottom Layer w0.381: EEPROM.1 24.181,73.139 24.181,50.219 26.36,48.04 28.55,48.04 34.239,42.351 v1(34.239,39.116)
"SS GYRO": "Gyro Board.4" dsPIC30F3011.10 | length 44.5
  Top Layer w0.381: v1(39.25,35.5) 40.29,36.54 45.52,36.54 46.098,35.962 dsPIC30F3011.10@46.098,34.738
  Bottom Layer w0.381: 30.846,11.24 32.055,12.449 32.055,19.507 31.496,20.066 29.642,20.066 28.804,19.228 27.61,19.228 26.518,20.32 26.518,22.768 v1(39.25,35.5)
"SS TEMPSENSOR": "Temp Sensor Board.6" dsPIC30F3011.8 | length 39.5
  Top Layer w0.381: v1(39.116,38.684) 45.771,38.684 47.698,36.757 dsPIC30F3011.8@47.698,34.749
  Bottom Layer w0.381: 26.274,16.32 26.274,19.376 25.72,19.93 25.72,23.742 39.116,37.138 v1(39.116,38.684)
"SS TRI_AXIS": H48C.5 PIC18F4431.15 | length 37.1
  Top Layer w0.381: PIC18F4431.15 v1(23.537,48.616)
  Bottom Layer w0.381: H48C.5 23.537,80.095 v1(23.537,48.616)
"STATUS LED#1": PIC18F4431.2 R3.2 | length 28.2
  Top Layer w0.381: R3.2 25.37,26.84 30.83,32.3 30.83,34.36 29.276,35.914 PIC18F4431.2
"STATUS LED#2": PIC18F4431.8 R4.2 | length 55.9
  Top Layer w0.381: R4.2 v1(28.014,20.898) ; PIC18F4431.8 30.452,40.714 31.217,41.478 v1(40.335,41.478)
  Bottom Layer w0.381: v1(28.014,20.898) 40.335,33.219 v1(40.335,41.478)
"UC #MCLR": "uC/dsPIC ICD Header.3" PIC18F4431.18 R2.1 | length 50.3
  Top Layer w0.381: R2.1 22.124,50.966 22.681,50.409 63.005,50.409 63.384,50.788 ; v1(20.5,48.45) 21.137,47.813 PIC18F4431.18
  Bottom Layer w0.45: v1(20.5,48.45) 20.5,50.943 v1(20.523,50.966)
"UC PGC": "uC/dsPIC ICD Header.9" SPIBus/ICD.1 | length 55.2
  Top Layer w0.381: SPIBus/ICD.1 27.061,51.679 39.31,51.679 40.72,53.089 40.72,53.1 42.12,53.1 43.5,51.72 v1(56.31,51.72)
  Bottom Layer w0.381: v1(56.31,51.72) 56.341,51.689 56.341,36.909 57.702,35.548 63.384,35.548
"UC PGD": "uC/dsPIC ICD Header.6" SPIBus/ICD.4 | length 66.8
  Top Layer w0.381: v1(25.39,65.11) 40.115,65.11 44.205,61.02 54.43,61.02 56.24,59.21 62.4,59.21 64.715,56.895 64.715,51.565 65.45,50.83 65.45,45.234 63.384,43.168
  Bottom Layer w0.381: SPIBus/ICD.4 v1@25.4,65.1
"UC REFERENCE": PIC18F4431.22 R11.1 R12.2 ZD1.1 | length 10.4
  Top Layer w0.381: R12.2 R11.1 ZD1.1@14.699,49.366 ; ZD1.1@14.732,49.333 14.732,46.248 15.585,45.395 PIC18F4431.22
"UC RX": "GPS Header.3" PIC18F4431.1 Radio/DB9.8 | length 71.7
  Top Layer w0.381: 21.702,8.7 24.07,11.068 v1(24.07,17.7) ; v1(24.181,28.753) 27.584,32.156 27.584,35.114 PIC18F4431.1
  Bottom Layer w0.381: v1(24.07,17.7) 24.181,17.811 v1(24.181,28.753) 24.689,29.261 30.341,29.261 37.871,36.791 37.871,45.58 39.319,47.028 39.319,54.864 41.049,56.594 Radio/DB9.8
"UC SCK": H48C.1 HM55B.4 SPIBus/ICD.3 | length 89.3
  Top Layer w0.381: H48C.1 9.169,86.893 27.178,86.893 30.124,83.947 40.259,83.947 HM55B.4 ; v1(17.57,62.56) 30.28,62.56 ; 30.3,62.58 32.46,60.42 32.46,55.28 30.52,53.34 SPIBus/ICD.3
  Bottom Layer w0.381: H48C.1 17.57,73.362 v1(17.57,62.56)
"UC SDIO": H48C.2 HM55B.1 R1.2 SPIBus/ICD.6 | length 82.9
  Top Layer w0.381: H48C.2 5.15,83.242 5.15,84.6 8.18,87.63 33.6,87.63 34.32,88.35 34.32,90.92 33.834,91.406 HM55B.1 32.478,94.792 31.8,95.47 R1.2
  Bottom Layer w0.381: SPIBus/ICD.6 31.825,57.225 31.825,84.255 31.05,85.03 31.05,89.978 HM55B.1
"UC TX": dsPIC30F3011.11 PIC18F4431.44 Radio/DB9.4 | length 60.4
  Top Layer w0.381: v1(24.892,31.166) 25.4,31.166 25.937,31.703 PIC18F4431.44 ; v1(33.97,35.68) 35.7,33.95 40.1,33.95 40.888,34.738 dsPIC30F3011.11@45.298,34.738 ; v1(35.839,59.134) Radio/DB9.4
  Bottom Layer w0.381: v1(24.892,31.166) 29.456,31.166 v1(33.97,35.68) 34.77,35.68 36.601,37.511 36.601,41.327 36.284,41.645 36.284,49.216 35.839,49.661 v1(35.839,59.134)
"UNUSED 10": dsPIC30F3011.22 | length 1.1
  Top Layer w0.381: 43.017,23.497 dsPIC30F3011.22@43.017,24.589
"UNUSED 11": dsPIC30F3011.21 | length 1.3
  Top Layer w0.381: 41.689,25.389 dsPIC30F3011.21@43.017,25.389
"UNUSED 12": dsPIC30F3011.20 | length 1.4
  Top Layer w0.381: 41.579,26.189 dsPIC30F3011.20@43.017,26.189
"UNUSED 13": dsPIC30F3011.19 | length 0.9
  Top Layer w0.381: 42.141,26.989 dsPIC30F3011.19@43.017,26.989
"UNUSED 14": dsPIC30F3011.5 | length 1.9
  Top Layer w0.381: dsPIC30F3011.5@50.098,34.749 50.098,36.642
"UNUSED 15": dsPIC30F3011.4 | length 1.7
  Top Layer w0.381: dsPIC30F3011.4@50.898,34.749 50.898,36.442
"UNUSED 17": PIC18F4431.4 | length 1.2
  Top Layer w0.381: PIC18F4431.4 29.256,37.514
"UNUSED 21": PIC18F4431.35 | length 1.6
  Top Layer w0.381: 18.737,31.197 PIC18F4431.35
"UNUSED 22": PIC18F4431.37 | length 1.3
  Top Layer w0.381: 20.337,31.554 PIC18F4431.37
"UNUSED 23": PIC18F4431.38 | length 1.3
  Top Layer w0.381: 21.137,31.543 PIC18F4431.38
"UNUSED X": dsPIC30F3011.41 | length 1.9
  Top Layer w0.381: dsPIC30F3011.41@55.579,30.189 57.461,30.189
"UNUSED Y": dsPIC30F3011.42 | length 1.8
  Top Layer w0.381: dsPIC30F3011.42@55.579,30.989 57.429,30.989
pads on no net: "Comp 1.5" "Comp 1.6" "ICD Header.6" dsPIC30F3011.12 dsPIC30F3011.13 dsPIC30F3011.15 dsPIC30F3011.32 dsPIC30F3011.34 EEPROM.3 EEPROM.7 H48C.4 PIC18F4431.12 PIC18F4431.13 PIC18F4431.33 PIC18F4431.34 PIC18F4431.42 PIC18F4431.43

## Polygon pours and split planes (outlines as drawn)
GND on Top Layer (solid, remove dead copper): 69.97,98.47 69.97,-0.05 -0.05,-0.05 -0.05,98.47
GND on Bottom Layer (solid, remove dead copper): 69.97,-0.05 69.97,98.47 -0.05,98.47 -0.05,-0.05

## Other copper
Top Layer:
  rectangle: 16.78,33.87 27.02,44.34

## Text inside footprints (layer, text, board x,y; h text height)
Radio/DB9: Top Overlay "1" at 54.856,59.642 h1.27 r180
SPIBus/ICD: Top Overlay "1" at 23.368,52.832 h1.27
"SPIBus/ICD dsPIC": Top Overlay "1" at 55.004,49.568 h1.27 r180